# Altium PCB 2014-9-14呼叫器.PcbDoc (part 1 of 2)
Units mm, origin at the board's own origin, x right, y up, seen from the top; angles counter-clockwise.
Board outline 60 x 92 mm, 2 copper layers (Top Layer, Bottom Layer); 55 components, 35 nets, 210 pads, 44 vias.
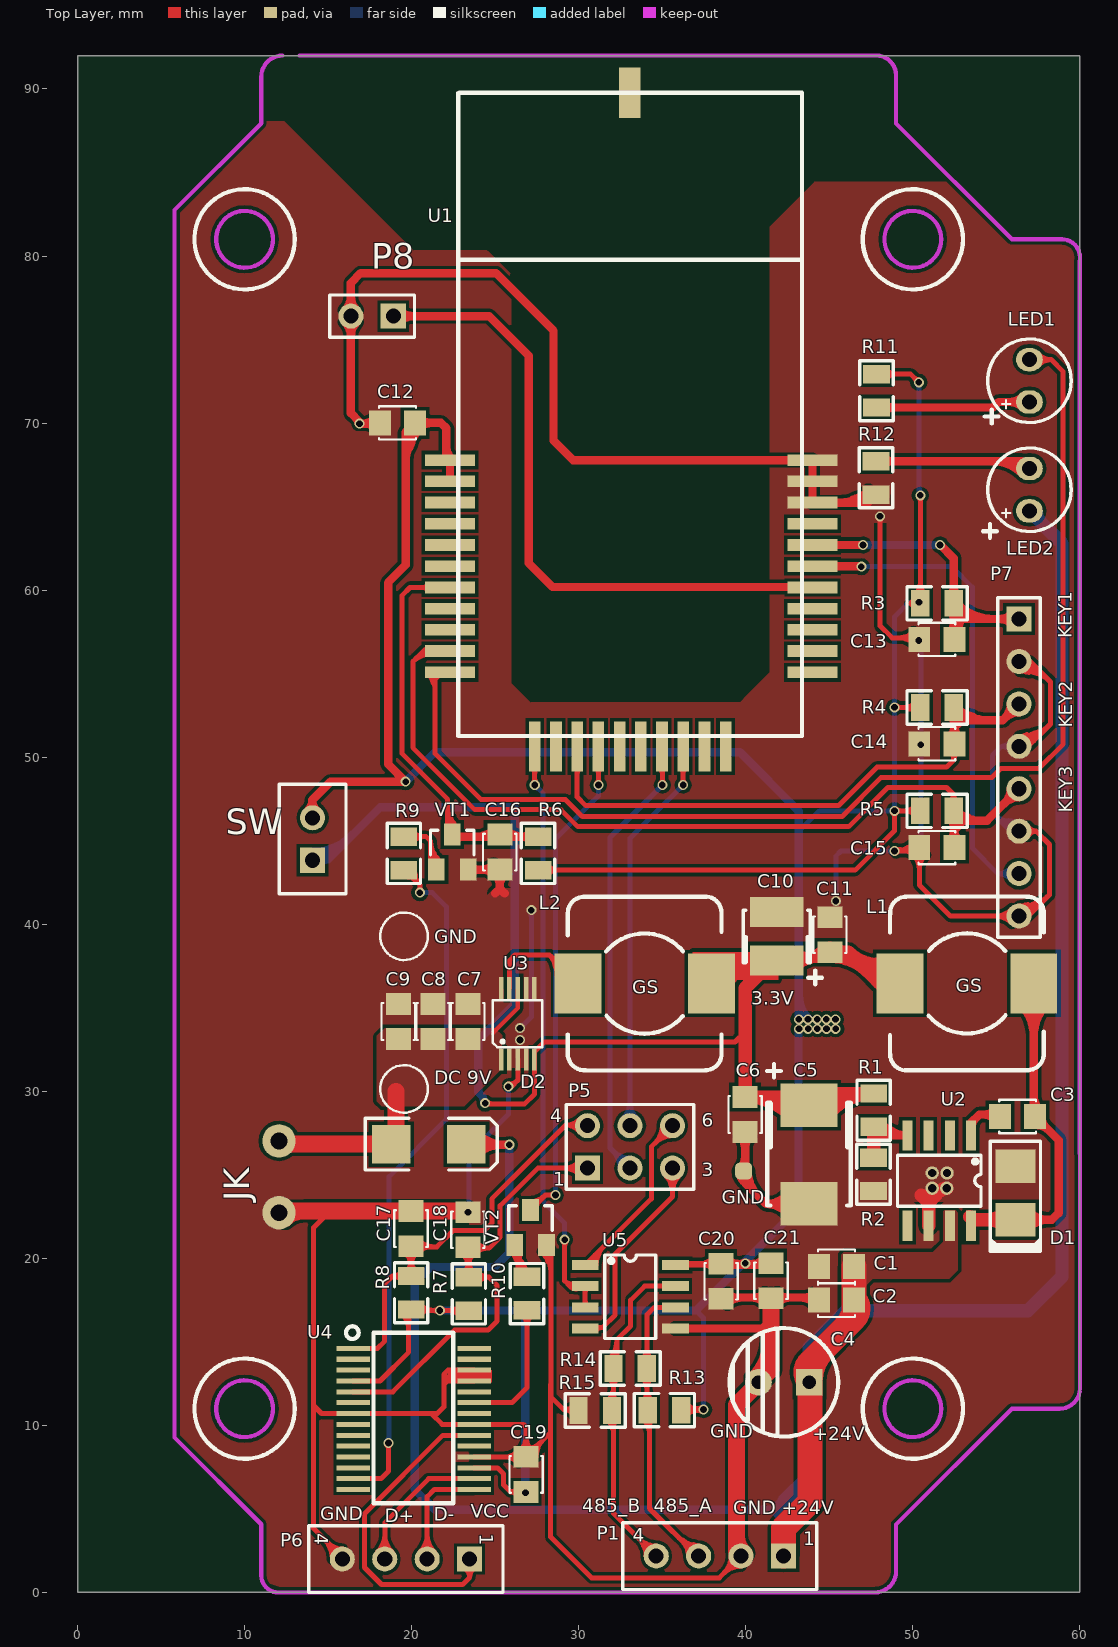
[diagram p0: Top Layer view]
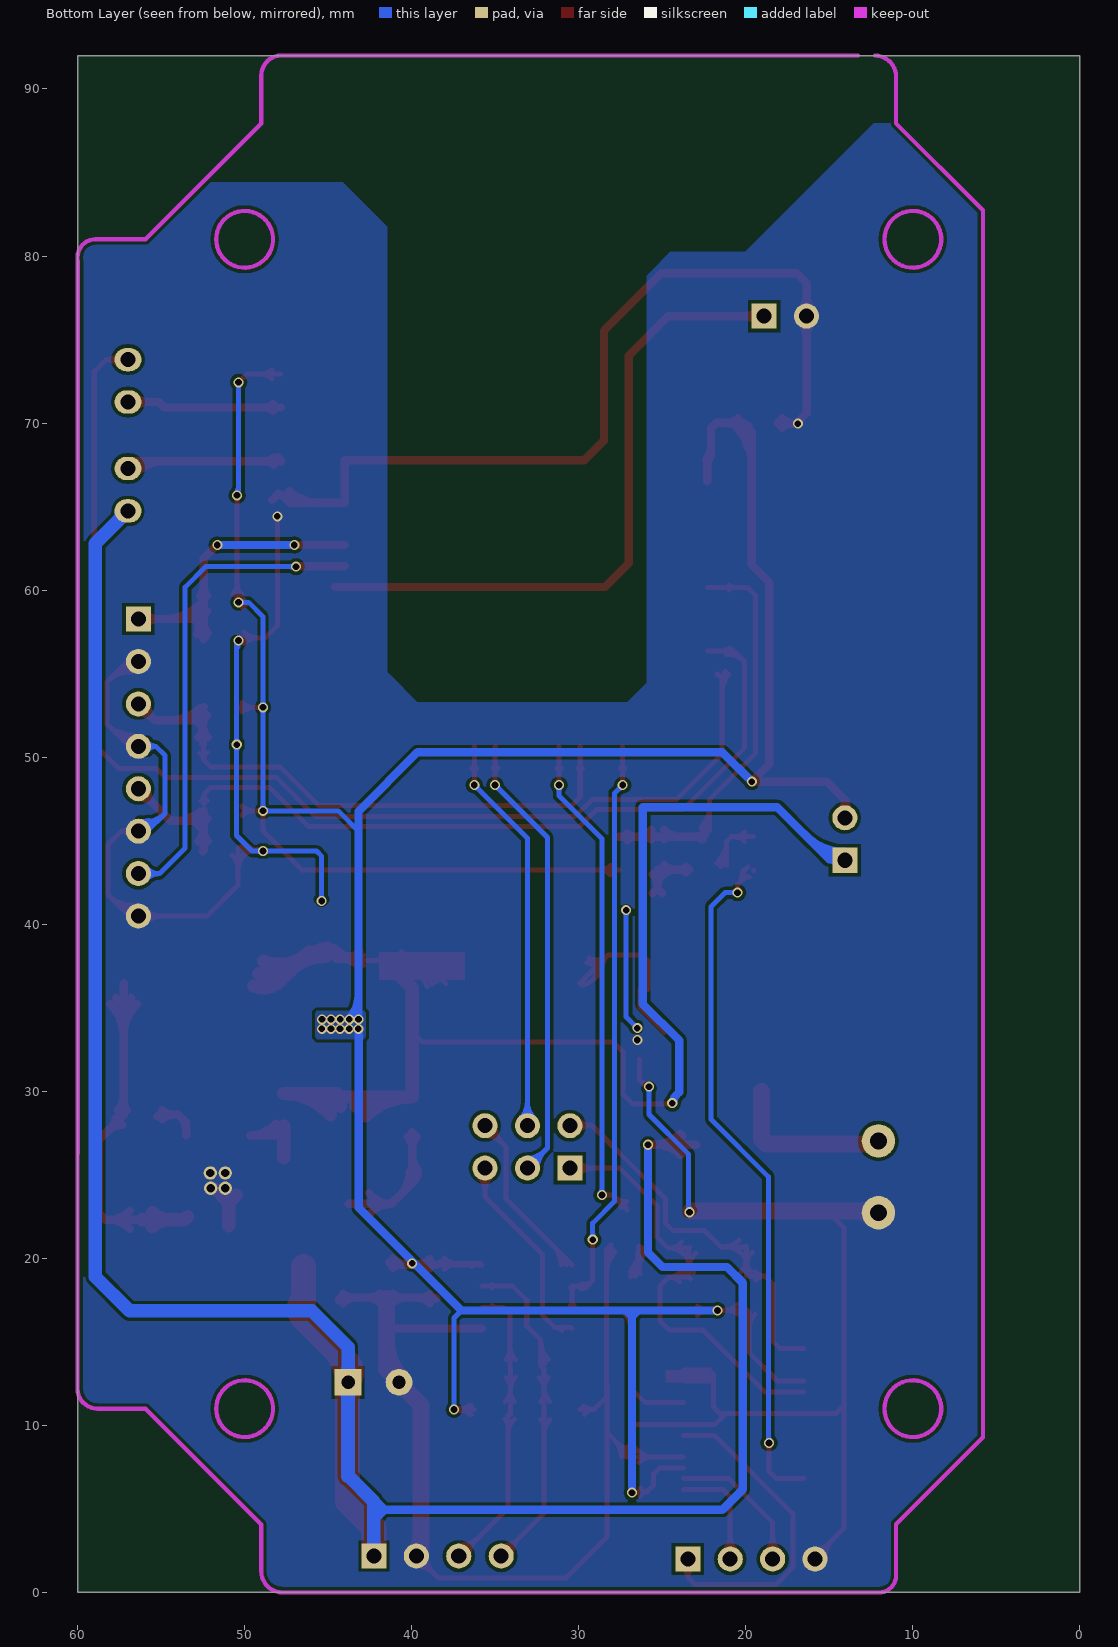
[diagram p1: Bottom Layer view, seen from below]

## Layer stack, top to bottom
Top Solder: solder mask 0.0102, Solder Resist, Dk 3.5
Top Layer: signal copper 0.0356
Dielectric1: dielectric 0.32, FR-4, Dk 4.8
Bottom Layer: signal copper 0.0356
Bottom Solder: solder mask 0.0102, Solder Resist, Dk 3.5

## Board outline
0,0 60,0 60,92 0,92

## Design rules (kind name [scope] priority, off if disabled: settings)
Clearance [All] p1: gap=0.2
FabricationTestPointUsage TestPointUsage [All] p1: valid=0 allowmultiple=FALSE
FabricationTestpoint Testpoint [All] p1: side=3 testpointundercomponent=TRUE minsize=1.016 maxsize=2.54 preferedsize=1.524 minholesize=0 maxholesize=1.016 preferedholesize=0.813 testpointgrid=0.025 allowsidetop=TRUE allowsidebottom=TRUE usegrid=TRUE gridtolerance=0
PolygonConnect [All] p1: connectstyle=Direct reliefconductorwidth=0.5 reliefentries=4 polygonreliefangle="90 Angle" airgapwidth=0.254
RoutingVias [All] p1: holewidth=0.711 width=1.27 viastyle="Through Hole" minholewidth=0.711 minwidth=1.27 maxholewidth=0.711 maxwidth=1.27
SolderMaskExpansion [All] p1: expansion=0.102
Width [All] p1: maxlimit=2 minlimit=0.254 preferedwidth=0.3 minimp=50.000000 maximp=50.000000 favimp=50.000000
27 further rules are at their usual default settings.

## Components (designator, comment, footprint, x,y, rotation, side; value= is the part's Value field where it differs from the comment)
C1 "4.7μF/10%/0805" C-0805 43.73,18.62 r0 top
C2 "4.7μF/10%/0805" C-0805 43.73,16.6 r0 top
C3 "0.01μF/10%/0805" C-0805 54.57,27.59 r0 top
C4 "220μF" CZ3.0/6.5 42.28,12.58 r0 top
C5 "476C" C-TAN-D 41.28,30.46 r270 top
C6 "0.1μf/10%/0805" C-0805 40.86,26.91 r90 top
C7 "4.7μF/10%/0805" C-0805 22.462,35.876 r270 top
C8 "4.7μF/10%/0805" C-0805 20.382,35.876 r270 top
C9 "4.7μF/10%/0805" C-0805 18.302,35.876 r270 top
C10 "47uF/20%/10V/B" C-TAN-B 43.85,36.94 r90 top
C11 "0.1μf/10%/0805" C-0805 44.14,41.07 r270 top
C12 "0.1uf/10%/0805" C-0805 17.45,69.11 r0 top
C13 "0.1uf/10%/0805" C-0805 49.74,56.15 r0 top
C14 "0.1uf/10%/0805" C-0805 49.74,49.9 r0 top
C15 "0.1uf/10%/0805" C-0805 49.74,43.69 r0 top
C16 "0.1uf/10%/0805" C-0805 26.18,42.62 r90 top
C17 "100pf/10%/0805" C-0805 19.06,23.48 r270 top
C18 "100pf/10%/0805" C-0805 22.47,23.41 r270 top
C19 "0.1μf/10%/0805" C-0805 25.95,8.77 r270 top
C20 "0.1uf/10%/0805" C-0805 39.42,16.93 r90 top
C21 "1uf/10%/0805" C-0805 42.41,16.96 r90 top
D1 "1N5408/SMA" "SMA 2+" 54.59,27.05 r270 top
D2 "1N5408/SMB" smb 21.03,26.84 r0 top
L1 "15μH" GSDS104C2 53.24,36.46 r270 top
L2 "15μH" GSDS104C2 33.95,36.45 r90 top
LED1 "green LED" LED-φ3 56.98,72.53 r90 top
LED2 "VDD33" LED-φ3 56.98,66.01 r90 top
P1 "1*4/2.54排针" PIN-S-2.54-1*4 42.26,2.18 r180 top locked
P5 "2*3排针" HDR2X3_CEN 30.53,25.4 r0 top
P6 "1*4/2.54排针" PIN-S-2.54-1*4 23.47,2 r180 top
P7 "Header 8" HDR1X8 56.36,58.27 r270 top (schematic designator P6)
P8 "Header 2" HDR1X2 18.9,76.4 r180 top
R1 "10K" R-0805 48.56,27.37 r90 top
R2 "7580M\3.24K" R-0805 46.75,26.53 r270 top
R3 "10K/5%/0805" R-0805 52.95,60.11 r180 top
R4 "10K/5%/0805" R-0805 52.95,53.88 r180 top
R5 "10K/5%/0805" R-0805 52.95,47.69 r180 top
R6 "10K/5%/0805" R-0805 26.67,45.74 r270 top
R7 "3.3K/5%/0805" R-0805 22.52,19.37 r270 top
R8 "3.3K/5%/0805" R-0805 19.07,19.44 r270 top
R9 "1K/5%/0805" R-0805 18.63,45.74 r270 top
R10 "1K/5%/0805" R-0805 26.01,19.39 r270 top
R11 "3.3K/5%/0805" R-0805 46.92,73.43 r270 top
R12 "1.5K/5%/0805" R-0805 48.69,65.22 r90 top
R13 "3.3K/5%/0805" R-0805 33.63,10.01 r0 top
R14 "120ohm" R-0805 31.58,12.5 r0 top
R15 "3.3K/5%/0805" R-0805 29.49,9.99 r0 top
SW "SW-1" PIN-S-2.54-1*2 14.07,43.83 r90 top
U1 "STM32W_1" STM32W108-3 43.37,51.27 r90 top locked
U2 "TPS5430" SO-G8#1 51.57,24.65 r180 top
U3 "TPS62056" MSOP-10 25.352,32.006 r0 top
U4 "FT232R" SSOP-28 16.5,14.61 r0 top
U5 "MAX3485CSA" SO-G8#2 33.09,17.69 r270 top
VT1 "2N3904" SOT23-3 21.48,43.27 r0 top
VT2 "2N3904" SOT23-3 26.17,20.8 r0 top locked

## Footprints (in the part's own frame and the unit in brackets; to place one, negate y for a bottom-side part, rotate by r counter-clockwise, add the part's x,y. Pads: shape width x height; smd on the part's side, far side on the other; paste and mask are expansions set on the pad)
C-0805 [mm]
  rect 1.3x1.5 smd: 1(0.65,0.9) 2(2.75,0.9)
  silkscreen extent 0.6,-0.1 2.8,1.9
C-TAN-B [mm]
  rect 1.8x3.2 smd: 1(0.9,2) 2(3.8,2)
  silkscreen extent 0.75,0 3.9,4
C-TAN-D [mm]
  rect 2.6x3.4 smd: 1(1.3,2.5) 2(7.2,2.5)
  silkscreen extent 1.15,0 7.3,5
CZ3.0/6.5 [mm]
  rect 1.6x1.6 hole 0.8: 1(1.524,0)
  round 1.6 hole 0.8: 2(-1.524,0)
  silkscreen extent -3.25,-3.25 3.25,3.25
GSDS104C2 [mm]
  rect 3.6x2.8 smd: 1(0,4) 2(0,-4)
  silkscreen extent -5.2,-4.6 5.21,4.6
HDR1X2 [mm] "Connector; Header; 2 Position"
  rect 1.5x1.5 hole 0.9: 1(0,0)
  round 1.5 hole 0.9: 2(2.54,0)
  silkscreen extent -1.27,-1.27 3.81,1.27
HDR1X8 [mm] "Connector; Header; 8 Position"
  rect 1.5x1.5 hole 0.9: 1(0,0)
  round 1.5 hole 0.9: 2(2.54,0) 3(5.08,0) 4(7.62,0) 5(10.16,0) 6(12.7,0) 7(15.24,0) 8(17.78,0)
  silkscreen extent -1.27,-1.27 19.05,1.27
HDR2X3_CEN [mm] "Connector; Header; 3x2 Position"
  rect 1.5x1.5 hole 0.9: 1(0,0)
  round 1.5 hole 0.9: 2(2.54,0) 3(5.08,0) 4(0,2.54) 5(2.54,2.54) 6(5.08,2.54)
  silkscreen extent -1.27,-1.27 6.35,3.81
LED-φ3 [mm]
  oval 1.4x1.6 hole 0.9: 1(-1.27,0) 2(1.27,0)
  silkscreen extent -2.5,-2.5 2.5,2.5
MSOP-10 [mm]
  rect 0.27x1.3 smd mask+0.05: 1(0,-0.1) 2(0.5,-0.1) 3(1,-0.1) 4(1.5,-0.1) 5(2,-0.1) 6(2,4.175) 7(1.5,4.175) 8(1,4.175) 9(0.5,4.175) 10(0,4.175)
  silkscreen extent -0.51,0.64 2.46,3.43
PIN-S-2.54-1*2 [mm]
  rect 1.5x1.5 hole 0.9: 1(0,0)
  round 1.5 hole 0.9: 2(2.54,0)
  silkscreen extent -2,-2 4.54,2
PIN-S-2.54-1*4 [mm]
  rect 1.5x1.5 hole 0.9: 1(0,0)
  round 1.5 hole 0.9: 2(2.54,0) 3(5.08,0) 4(7.62,0)
  silkscreen extent -2,-2 9.62,2
R-0805 [mm]
  rect 1.1x1.6 smd: 1(0.5,0.9) 2(2.5,0.9)
  silkscreen extent -0.3,-0.1 3.3,1.9
"SMA 2+" [mm]
  rect 2x2.4 smd: 1(1.538,1.554) 2(4.738,1.554)
  silkscreen extent 0.04,0.05 6.64,3.05
smb [mm] "DO-214-AA/SMB; 2 C-Bend Leads; Body 5.3 x 3.6 mm, inc. leads (LxW)"
  rect 2.3x2.3 smd: 1(-2.25,0) 2(2.25,0)
  silkscreen extent -3.8,-1.55 4.1,1.55
SO-G8#1 [mm]
  rect 0.6x1.8 smd: 1(-1.916,-2.7) 2(-0.646,-2.7) 3(0.624,-2.7) 4(1.894,-2.7) 5(1.894,2.7) 6(0.624,2.7) 7(-0.646,2.7) 8(-1.916,2.7)
  silkscreen extent -2.51,-1.52 2.49,1.52
SO-G8#2 [mm]
  rect 0.6x1.6 smd: 1(-1.916,-2.7) 2(-0.646,-2.7) 3(0.624,-2.7) 4(1.894,-2.7) 5(1.894,2.7) 6(0.624,2.7) 7(-0.646,2.7) 8(-1.916,2.7)
  silkscreen extent -2.51,-1.52 2.49,1.52
SOT23-3 [mm]
  rect 1x1.3 smd: 1(0,0) 2(1.9,0) 3(0.95,2.1)
  silkscreen extent -0.35,0.87 2.25,2.35
SSOP-28 [mm]
  rect 2x0.3 smd: 1(0,0) 2(0,-0.65) 3(0,-1.3) 4(0,-1.95) 5(0,-2.6) 6(0,-3.25) 7(0,-3.9) 8(0,-4.55) 9(0,-5.2) 10(0,-5.85) 11(0,-6.5) 12(0,-7.15) 13(0,-7.8) 14(0,-8.45) 15(7.239,-8.45) 16(7.239,-7.8) 17(7.239,-7.15) 18(7.239,-6.5) 19(7.239,-5.85) 20(7.239,-5.2) 21(7.239,-4.55) 22(7.239,-3.9) 23(7.239,-3.25) 24(7.239,-2.6) 25(7.239,-1.95) 26(7.239,-1.3) 27(7.239,-0.65) 28(7.239,0)
  silkscreen extent -0.43,-9.27 5.99,1.32
STM32W108-3 [mm]
  rect 0.7x3 smd: 1(16.51,21.074) 2(15.24,21.074) 3(13.97,21.074) 4(12.7,21.074) 5(11.43,21.074) 6(10.16,21.074) 7(8.89,21.074) 8(7.62,21.074) 9(6.35,21.074) 10(5.08,21.074) 11(3.81,21.074) 22(3.81,-0.627) 23(5.08,-0.627) 24(6.35,-0.627) 25(7.62,-0.627) 26(8.89,-0.627) 27(10.16,-0.627) 28(11.43,-0.627) 29(12.7,-0.627) 30(13.97,-0.627) 31(15.24,-0.627) 32(16.51,-0.627)
  rect 3x0.7 smd: 12(-0.627,16.002) 13(-0.627,14.732) 14(-0.627,13.462) 15(-0.627,12.192) 16(-0.627,10.922) 17(-0.627,9.652) 18(-0.627,8.382) 19(-0.627,7.112) 20(-0.627,5.842) 21(-0.627,4.572)
  rect 3x1.3 smd: ""(38.5,10.314)
  silkscreen extent 0,0 38.5,20.57

## Part data
C1 C2 C3 C6 C7 C8 C9 C11 C12 C13 C14 C15 C16 C17 C18 C19 C20 C21: library part Cap, "Capacitor"
C4 C5: library part "Cap Pol1", "Polarized Capacitor (Radial)"
C10: library part ASC-0013BA
D1 D2: library part "Diode 1N5408", "3 Amp Medium Power Silicon Rectifier Diode"
L1 L2: library part Inductor, "Inductor"
LED1: library part LED
LED2: library part LED3, "Typical BLUE SiC LED"
P1 P6: library part "Header 4", "Header, 4-Pin"
P5: library part "Header 3X2A", "Header, 3-Pin, Dual row"
P7: "Header, 8-Pin"
P8: "Header, 2-Pin"
R1 R2 R3 R4 R5 R6 R12: library part Res2, "Resistor"
R7 R8: library part RES_1
R9 R10 R11 R13 R14 R15: library part RES, "R"
U1: library part STM32W108-3
U5: library part MAX485CSA, "Low-Power, Slew-Rate-Limited RS-485/RS-422 Transceiver"
VT1 VT2: library part NPN, "NPN Transistor"

## Free pads (board coordinates)
  round 2 hole 1: 0(12.06,22.73) 1(12.06,27.03)
  round 0.8 hole 0.5: 0(51.16,25.11) 1(52.05,25.11) 2(51.16,24.2) 3(52.03,24.2)
  rrect50% 1x1 smd: 5(39.87,25.23)

## Via types
v1: diameter 0.6, hole 0.4, Top Layer to Bottom Layer, 44 vias

## Nets (pads, with @x,y where several pads share a name; then routed paths per layer and width w, separated by ;. In a path a pad name is that pad's centre, name@x,y a point inside that pad or via, vN(x,y) a via of type N, cw(c..) or ccw(c..) an arc to the next point about the centre after c; other vN are vias at no path point)
485_A: P1.3 R13.1 R14.2 U5.6 | length 52.6
  Top Layer w0.3: R13.1@34.08,10.64 R14.2@34.08,13.4 34.1,13.42 34.1,16.64 34.526,17.066 U5.6@35.79,17.066 ; R13.1@34.24,10.64 34.24,5.03 37.09,2.18 P1.3@37.18,2.18 ; 36.371,2.997 cw(c36.075,1.895) P1.3@37.18,2.18 ; 36.392,2.883 ccw(c37.321,3.131) P1.3@37.18,2.18 ; 36.867,2.864 cw(c36.647,2.043) P1.3@37.47,2.255 ; 34.08,12.184 cw(c35.046,12.184) 34.363,12.867 ccw(c35.046,12.184) 34.08,12.184 ; 34.08,12.184 ccw(c33.114,12.184) 33.797,12.867 cw(c33.114,12.184) 34.08,12.184 ; 34.928,17.066 cw(c34.928,16.704) U5.6@35.184,16.96 ; 34.928,17.066 ccw(c34.928,17.428) U5.6@35.184,17.172 ; 34.928,17.066 cw(c34.928,16.704) U5.6@35.184,16.96 ; 34.928,17.066 ccw(c34.928,17.428) U5.6@35.184,17.172 ; 34.928,17.066 cw(c34.928,16.704) U5.6@35.184,16.96 ; 34.928,17.066 ccw(c34.928,17.428) U5.6@35.184,17.172 ; 34.928,17.066 cw(c34.928,16.704) U5.6@35.184,16.96 ; 34.928,17.066 ccw(c34.928,17.428) U5.6@35.184,17.172 ; 36.22,3.14 cw(c35.346,2.266) 36.581,2.208 ccw(c35.346,2.266) 36.22,3.14 ; 36.22,3.14 ccw(c37.094,4.014) 37.152,2.779 cw(c37.094,4.014) 36.22,3.14 ; 36.51,2.533 ccw(c37.356,2.718) P1.3@37.087,1.895 ; 36.51,2.533 ccw(c37.356,2.718) P1.3@37.087,1.895 ; 36.51,2.533 ccw(c37.356,2.718) P1.3@37.087,1.895 ; 36.51,2.533 ccw(c37.356,2.718) P1.3@37.087,1.895 ; 36.827,2.85 cw(c36.642,2.004) P1.3@37.465,2.273 ; 36.827,2.85 cw(c36.642,2.004) P1.3@37.465,2.273 ; 36.827,2.85 cw(c36.642,2.004) P1.3@37.465,2.273 ; 36.827,2.85 cw(c36.642,2.004) P1.3@37.465,2.273 ; R14.2@33.797,13.933 ccw(c33.066,14.664) 34.1,14.664 cw(c33.066,14.664) R14.2@33.797,13.933 ; R13.1@33.847,10.377 cw(c32.899,9.429) 34.24,9.429 ccw(c32.899,9.429) R13.1@33.847,10.377 ; R13.1@33.847,11.443 ccw(c33.285,12.005) 34.08,12.005 cw(c33.285,12.005) R13.1@33.847,11.443 ; 34.08,12.246 ccw(c35.216,12.246) 34.413,11.443 cw(c35.216,12.246) 34.08,12.246 ; 34.1,14.567 ccw(c34.997,14.567) 34.363,13.933 cw(c34.997,14.567) 34.1,14.567 ; 34.24,9.96 cw(c34.83,9.96) 34.413,10.377 ccw(c34.83,9.96) 34.24,9.96 ; 36.002,3.268 ccw(c37.18,4.446) 37.18,2.78 cw(c37.18,4.446) 36.002,3.268 ; 36.219,3.051 cw(c35.349,2.18) 36.58,2.18 ccw(c35.349,2.18) 36.219,3.051 ; 36.514,2.756 ccw(c37.18,3.422) 37.18,2.48 cw(c37.18,3.422) 36.514,2.756
485_B: P1.4 R14.1 R15.2 U5.7 | length 55.3
  Top Layer w0.3: 33.837,2.936 ccw(c34.85,3.207) P1.4@34.64,2.18 ; 33.884,2.983 cw(c33.613,1.97) P1.4@34.64,2.18 ; U5.7@35.79,18.336 33.946,18.336 33.11,17.5 33.11,15.95 32.28,15.12 32.28,13.6 R14.1@32.08,13.4 32.08,4.74 P1.4@34.64,2.18 ; R15.2@31.707,10.357 cw(c30.807,9.457) 32.08,9.457 ; R15.2@31.707,10.357 cw(c30.807,9.457) 32.08,9.457 ; R15.2@31.707,10.357 cw(c30.807,9.457) 32.08,9.457 ; R15.2@31.707,10.357 cw(c30.807,9.457) 32.08,9.457 ; R15.2@31.707,11.423 ccw(c30.807,12.323) 32.08,12.323 ; R15.2@31.707,11.423 ccw(c30.807,12.323) 32.08,12.323 ; R15.2@31.707,11.423 ccw(c30.807,12.323) 32.08,12.323 ; R15.2@31.707,11.423 ccw(c30.807,12.323) 32.08,12.323 ; R14.1@31.797,12.867 cw(c31.114,12.184) 32.08,12.184 ; R14.1@31.797,12.867 cw(c31.114,12.184) 32.08,12.184 ; R14.1@31.797,12.867 cw(c31.114,12.184) 32.08,12.184 ; R14.1@31.797,12.867 cw(c31.114,12.184) 32.08,12.184 ; R14.1@31.797,13.933 ccw(c30.631,15.099) 32.28,15.099 ; R14.1@31.797,13.933 ccw(c30.631,15.099) 32.28,15.099 ; R14.1@31.797,13.933 ccw(c30.631,15.099) 32.28,15.099 ; R14.1@31.797,13.933 ccw(c30.631,15.099) 32.28,15.099 ; R14.1@32.009,13.721 ccw(c31.356,14.374) 32.28,14.374 ; R14.1@32.009,13.721 ccw(c31.356,14.374) 32.28,14.374 ; R14.1@32.009,13.721 ccw(c31.356,14.374) 32.28,14.374 ; R14.1@32.009,13.721 ccw(c31.356,14.374) 32.28,14.374 ; 32.08,9.892 cw(c32.738,9.892) R15.2@32.273,10.357 ; 32.08,9.892 cw(c32.738,9.892) R15.2@32.273,10.357 ; 32.08,9.892 cw(c32.738,9.892) R15.2@32.273,10.357 ; 32.08,9.892 cw(c32.738,9.892) R15.2@32.273,10.357 ; 32.08,11.888 ccw(c32.738,11.888) R15.2@32.273,11.423 ; 32.08,11.888 ccw(c32.738,11.888) R15.2@32.273,11.423 ; 32.08,11.888 ccw(c32.738,11.888) R15.2@32.273,11.423 ; 32.08,11.888 ccw(c32.738,11.888) R15.2@32.273,11.423 ; 32.08,12.184 cw(c33.046,12.184) R14.1@32.363,12.867 ; 32.08,12.184 cw(c33.046,12.184) R14.1@32.363,12.867 ; 32.08,12.184 cw(c33.046,12.184) R14.1@32.363,12.867 ; 32.08,12.184 cw(c33.046,12.184) R14.1@32.363,12.867 ; 33.616,3.204 cw(c32.591,2.18) 34.04,2.18 ccw(c32.591,2.18) 33.616,3.204 ; 33.616,3.204 ccw(c34.64,4.229) 34.64,2.78 cw(c34.64,4.229) 33.616,3.204 ; 34.928,18.336 cw(c34.928,17.974) U5.7@35.184,18.23 ; 34.928,18.336 ccw(c34.928,18.698) U5.7@35.184,18.442 ; 34.928,18.336 cw(c34.928,17.974) U5.7@35.184,18.23 ; 34.928,18.336 ccw(c34.928,18.698) U5.7@35.184,18.442 ; 34.928,18.336 cw(c34.928,17.974) U5.7@35.184,18.23 ; 34.928,18.336 ccw(c34.928,18.698) U5.7@35.184,18.442 ; 34.928,18.336 cw(c34.928,17.974) U5.7@35.184,18.23 ; 34.928,18.336 ccw(c34.928,18.698) U5.7@35.184,18.442
/RESET: C16.2 R6.1 U1.7 VT1.3 | length 57.2
  Top Layer w0.3: VT1.3@22.208,45.791 ccw(c21.91,46.155) 22.318,46.39 ; U1.7@22.296,60.16 19.9,60.16 19.43,59.69 19.43,50.21 22.16,47.48 22.16,45.64 VT1.3@22.43,45.37 ; VT1.3@22.398,45.559 ccw(c22.137,45.878) 22.494,46.085 ; 20.663,60.16 cw(c20.663,59.677) U1.7@21.005,60.019 ; 20.663,60.16 ccw(c20.663,60.643) U1.7@21.005,60.301 ; 20.663,60.16 cw(c20.663,59.677) U1.7@21.005,60.019 ; 20.663,60.16 ccw(c20.663,60.643) U1.7@21.005,60.301 ; 20.663,60.16 cw(c20.663,59.677) U1.7@21.005,60.019 ; 20.663,60.16 ccw(c20.663,60.643) U1.7@21.005,60.301 ; 20.663,60.16 cw(c20.663,59.677) U1.7@21.005,60.019 ; 20.663,60.16 ccw(c20.663,60.643) U1.7@21.005,60.301 ; 22.16,46.292 ccw(c23.203,46.292) VT1.3@22.465,45.555 ; 22.16,46.292 ccw(c23.203,46.292) VT1.3@22.465,45.555 ; 22.16,46.292 ccw(c23.203,46.292) VT1.3@22.465,45.555 ; 22.16,46.292 ccw(c23.203,46.292) VT1.3@22.465,45.555 ; VT1.3@22.18,45.765 ccw(c22.041,45.901) VT1.3@22.209,45.998 ; VT1.3@22.18,45.765 ccw(c22.041,45.901) VT1.3@22.209,45.998 ; VT1.3@22.18,45.765 ccw(c22.041,45.901) VT1.3@22.209,45.998 ; VT1.3@22.18,45.765 ccw(c22.041,45.901) VT1.3@22.209,45.998 ; VT1.3@22.18,45.765 ccw(c22.041,45.901) VT1.3@22.209,45.998 ; VT1.3@22.209,45.998 ccw(c22.432,46.127) VT1.3@22.431,45.87 ; VT1.3@22.209,45.998 ccw(c22.432,46.127) VT1.3@22.431,45.87 ; VT1.3@22.209,45.998 ccw(c22.432,46.127) VT1.3@22.431,45.87 ; VT1.3@22.209,45.998 ccw(c22.432,46.127) VT1.3@22.431,45.87 ; VT1.3@22.209,45.998 ccw(c22.432,46.127) VT1.3@22.431,45.87 ; 22.16,47.017 ccw(c23.927,47.017) 22.677,45.767 cw(c23.927,47.017) 22.16,47.017
  Top Layer w0.5: VT1.3@22.43,45.37 22.56,45.24 R6.1@27.57,45.24 ; VT1.3@22.607,45.043 cw(c23.082,44.568) 23.082,45.24 ; VT1.3@22.607,45.043 cw(c23.082,44.568) 23.082,45.24 ; VT1.3@22.607,45.043 cw(c23.082,44.568) 23.082,45.24 ; VT1.3@22.607,45.043 cw(c23.082,44.568) 23.082,45.24 ; VT1.3@22.607,45.397 ccw(c22.985,45.775) 22.985,45.24 ; VT1.3@22.607,45.397 ccw(c22.985,45.775) 22.985,45.24 ; VT1.3@22.607,45.397 ccw(c22.985,45.775) 22.985,45.24 ; VT1.3@22.607,45.397 ccw(c22.985,45.775) 22.985,45.24 ; 23.901,45.24 ccw(c23.901,46.649) C16.2@24.897,45.653 ; 23.901,45.24 ccw(c23.901,46.649) C16.2@24.897,45.653 ; 23.901,45.24 ccw(c23.901,46.649) C16.2@24.897,45.653 ; 23.901,45.24 ccw(c23.901,46.649) C16.2@24.897,45.653 ; 24.528,45.24 cw(c24.528,44.718) C16.2@24.897,45.087 ; 24.528,45.24 cw(c24.528,44.718) C16.2@24.897,45.087 ; 24.528,45.24 cw(c24.528,44.718) C16.2@24.897,45.087 ; 24.528,45.24 cw(c24.528,44.718) C16.2@24.897,45.087 ; C16.2@25.663,45.087 cw(c26.032,44.718) 26.032,45.24 ; C16.2@25.663,45.087 cw(c26.032,44.718) 26.032,45.24 ; C16.2@25.663,45.087 cw(c26.032,44.718) 26.032,45.24 ; C16.2@25.663,45.087 cw(c26.032,44.718) 26.032,45.24 ; C16.2@25.663,45.653 ccw(c26.659,46.649) 26.659,45.24 ; C16.2@25.663,45.653 ccw(c26.659,46.649) 26.659,45.24 ; C16.2@25.663,45.653 ccw(c26.659,46.649) 26.659,45.24 ; C16.2@25.663,45.653 ccw(c26.659,46.649) 26.659,45.24 ; 26.596,45.24 cw(c26.596,44.516) R6.1@27.108,45.028 ; 26.596,45.24 ccw(c26.596,45.964) R6.1@27.108,45.452 ; 26.596,45.24 cw(c26.596,44.516) R6.1@27.108,45.028 ; 26.596,45.24 ccw(c26.596,45.964) R6.1@27.108,45.452 ; 26.596,45.24 cw(c26.596,44.516) R6.1@27.108,45.028 ; 26.596,45.24 ccw(c26.596,45.964) R6.1@27.108,45.452 ; 26.596,45.24 cw(c26.596,44.516) R6.1@27.108,45.028 ; 26.596,45.24 ccw(c26.596,45.964) R6.1@27.108,45.452
BOOT: U1.15 VT2.3 | length 44.2
  Top Layer w0.3: VT2.3@27.12,22.9 28.01,23.79 v1(28.61,23.79) ; VT2.3@27.167,23.034 cw(c27.958,22.757) 27.741,23.566 ; U1.15@31.178,50.643 31.18,50.641 v1(31.18,48.33) ; 28.248,23.79 cw(c28.248,23.428) 28.504,23.684 ccw(c28.248,23.428) 28.248,23.79 ; 28.248,23.79 ccw(c28.248,24.152) 28.504,23.896 cw(c28.248,24.152) 28.248,23.79 ; U1.15@31.037,49.352 cw(c30.69,49.005) 31.18,49.005 ; U1.15@31.037,49.352 cw(c30.69,49.005) 31.18,49.005 ; U1.15@31.037,49.352 cw(c30.69,49.005) 31.18,49.005 ; U1.15@31.037,49.352 cw(c30.69,49.005) 31.18,49.005 ; v1@31.074,48.436 ccw(c30.818,48.692) 31.18,48.692 ; v1@31.074,48.436 ccw(c30.818,48.692) 31.18,48.692 ; v1@31.074,48.436 ccw(c30.818,48.692) 31.18,48.692 ; v1@31.074,48.436 ccw(c30.818,48.692) 31.18,48.692 ; v1@31.074,48.436 ccw(c30.818,48.692) 31.18,48.692 ; 31.18,48.692 ccw(c31.542,48.692) v1@31.286,48.436 ; 31.18,48.692 ccw(c31.542,48.692) v1@31.286,48.436 ; 31.18,48.692 ccw(c31.542,48.692) v1@31.286,48.436 ; 31.18,48.692 ccw(c31.542,48.692) v1@31.286,48.436 ; 31.18,48.692 ccw(c31.542,48.692) v1@31.286,48.436 ; 31.18,49.015 cw(c31.656,49.015) U1.15@31.319,49.352 ; 31.18,49.015 cw(c31.656,49.015) U1.15@31.319,49.352 ; 31.18,49.015 cw(c31.656,49.015) U1.15@31.319,49.352 ; 31.18,49.015 cw(c31.656,49.015) U1.15@31.319,49.352 ; VT2.3@27.12,23.4 ccw(c27.12,24.607) 27.974,23.754 cw(c27.12,24.607) VT2.3@27.12,23.4 ; VT2.3@27.47,23.05 cw(c27.953,23.05) 27.611,23.391 ccw(c27.953,23.05) VT2.3@27.47,23.05
  Bottom Layer w0.3: v1(28.61,23.79) 28.62,23.8 28.62,45.13 31.18,47.69 v1(31.18,48.33) ; v1@31.074,48.224 cw(c30.818,47.968) 31.18,47.968 ; v1@31.074,48.224 cw(c30.818,47.968) 31.18,47.968 ; v1@31.074,48.224 cw(c30.818,47.968) 31.18,47.968 ; v1@31.074,48.224 cw(c30.818,47.968) 31.18,47.968 ; v1@31.074,48.224 cw(c30.818,47.968) 31.18,47.968 ; 31.18,47.968 cw(c31.542,47.968) v1@31.286,48.224 ; 31.18,47.968 cw(c31.542,47.968) v1@31.286,48.224 ; 31.18,47.968 cw(c31.542,47.968) v1@31.286,48.224 ; 31.18,47.968 cw(c31.542,47.968) v1@31.286,48.224 ; 31.18,47.968 cw(c31.542,47.968) v1@31.286,48.224 ; v1@28.504,23.896 ccw(c28.224,24.176) 28.62,24.176 cw(c28.224,24.176) v1@28.504,23.896 ; 28.62,24.128 ccw(c28.948,24.128) 28.716,23.896 cw(c28.948,24.128) 28.62,24.128
CBUS0: R10.2 U4.23 | length 14.2
  Top Layer w0.3: U4.23@23.739,11.36 26.01,11.36 26.91,12.26 R10.2@26.91,16.89 ; R10.2@26.627,16.607 cw(c25.944,15.924) 26.91,15.924 ; R10.2@26.627,16.607 cw(c25.944,15.924) 26.91,15.924 ; R10.2@26.627,16.607 cw(c25.944,15.924) 26.91,15.924 ; R10.2@26.627,16.607 cw(c25.944,15.924) 26.91,15.924 ; 26.91,15.924 cw(c27.876,15.924) R10.2@27.193,16.607 ; 26.91,15.924 cw(c27.876,15.924) R10.2@27.193,16.607 ; 26.91,15.924 cw(c27.876,15.924) R10.2@27.193,16.607 ; 26.91,15.924 cw(c27.876,15.924) R10.2@27.193,16.607
CBUS2: R9.2 U4.13 | length 48.3
  Top Layer w0.3: U4.13@16.5,6.81 18.16,6.81 18.61,7.26 v1(18.61,8.95) ; R9.2@19.51,43.22 R9.2@19.53,43.24 ; R9.2@19.879,43.414 cw(c19.523,42.788) R9.2@20.232,42.917 ; R9.2@19.96,42.89 20.49,42.36 ; v1(20.49,41.89) 20.49,42.36 ; 18.61,8.588 cw(c18.972,8.588) 18.716,8.844 ccw(c18.972,8.588) 18.61,8.588 ; 18.61,8.588 ccw(c18.248,8.588) 18.504,8.844 cw(c18.248,8.588) 18.61,8.588 ; 20.49,42.252 cw(c20.128,42.252) 20.384,41.996 ccw(c20.128,42.252) 20.49,42.252 ; 20.49,42.252 ccw(c20.852,42.252) 20.596,41.996 cw(c20.852,42.252) 20.49,42.252 ; 20.49,42.36 cw(c21.25,43.12) 20.179,43.207 ccw(c21.25,43.12) 20.49,42.36 ; R9.2@19.78,42.84 cw(c19.78,42.285) 20.173,42.677 ccw(c19.78,42.285) R9.2@19.78,42.84
  Bottom Layer w0.3: v1@18.49,8.95 18.65,9.11 18.65,24.89 22.08,28.32 22.08,41.05 21.24,41.89 v1(20.49,41.89) ; 20.852,41.89 cw(c20.852,42.252) 20.596,41.996 ccw(c20.852,42.252) 20.852,41.89 ; 20.852,41.89 ccw(c20.852,41.528) 20.596,41.784 cw(c20.852,41.528) 20.852,41.89 ; v1@18.504,9.056 ccw(c18.151,9.409) 18.65,9.409 cw(c18.151,9.409) v1@18.504,9.056
D+: P6.2 U4.15 | length 9
  Top Layer w0.3: P6.2@20.506,2.424 ccw(c19.481,3.449) 20.93,3.449 ccw(c22.379,3.449) P6.2@21.354,2.424 ; P6.2@20.93,2 20.93,5.73 21.36,6.16 U4.15@23.739,6.16
D-: P6.3 U4.16 | length 10.9
  Top Layer w0.3: P6.3@17.966,2.424 ccw(c16.941,3.449) 18.39,3.449 ccw(c19.839,3.449) P6.3@18.814,2.424 ; P6.3@18.39,2 18.39,4.18 21.02,6.81 U4.16@23.739,6.81
GND: C1.1 C2.1 C4.2 C5.2 C6.1 C7.1 C8.1 C9.1 C10.2 C11.1 C12.1 C13.1 C14.1 C15.1 C16.1 C17.1 C18.1 C19.1 C20.1 C21.1 D1.1 P1.2 P6.4 P7.2 P7.4 P7.6 P7.8 P8.2 pad.0 pad.1@52.05,25.11 pad.2 pad.3 pad.5 R2.2 R12.1 R15.1 U1.30 U1.31 U1.32 U2.6 U3.2 U3.3 U3.4 U3.6 U3.7 U3.10 U4.7 U4.18 U4.21 U4.25 U4.26 U5.5 VT1.2 VT2.2 | length 442.2
  Top Layer w0.3: pad.0@11.94,22.73 pad.0@12.04,22.83 ; 14.748,3.212 cw(c13.536,2) P6.4@15.25,2 ; 15.014,2.946 ccw(c15.85,3.783) P6.4@15.85,2.6 ; 15.11,22.83 14.12,21.84 14.12,11.19 ; 15.26,2.7 cw(c14.56,2) P6.4@15.55,2 ; P6.4@15.85,2 15.85,2.11 14.12,3.84 14.12,11.19 ; 21.97,12.49 22.14,12.66 ; 21.97,12.83 22.14,12.66 ; U4.18@23.739,8.11 26.84,8.11 C19.1@26.85,8.12 ; U4.25@23.739,12.66 22.14,12.66 ; U4.26@23.739,13.31 22.18,13.31 21.93,13.06 21.93,11.1 21.54,10.71 21.18,10.71 ; 25.519,8.11 ccw(c25.519,9.351) C19.1@26.396,8.474 ; 25.567,8.11 cw(c25.567,6.937) C19.1@26.396,7.766 ; v1(25.79,30.28) 25.98,30.28 26.352,30.652 ; U3.3@26.352,31.906 26.352,30.652 ; C19.1@26.496,8.474 ccw(c25.643,9.327) 26.85,9.327 ccw(c28.057,9.327) C19.1@27.204,8.474 ; C19.1@26.95,8.62 ccw(c26.95,9.586) 27.633,8.903 ; C19.1@27.15,8.12 cw(c27.874,8.12) C19.1@27.362,8.632 ; C19.1@27.45,8.12 cw(c28.899,8.12) 27.874,9.144 ; 28.001,20.094 cw(c28.348,20.295) VT2.2@28.101,20.611 ; VT2.2@28.07,20.8 28.33,20.54 28.33,11.71 29.08,10.96 ; 28.173,19.795 cw(c28.563,20.02) VT2.2@28.286,20.374 ; 28.32,12.44 28.32,9.59 ; R15.1@29.92,10.96 29.08,10.96 ; P1.2@39.12,2.18 cw(c37.671,2.18) 38.696,1.156 cw(c39.72,0.131) P1.2@39.72,1.58 ; P1.2@39.72,2.18 38.42,0.88 30.76,0.88 28.32,3.32 28.32,9.59 ; v1(48.04,64.42) 48.04,57.86 48.76,57.14 50.3,57.14 C13.1@50.39,57.05 ; v1(48.9,44.38) C15.1@49.85,44.38 ; C13.1@49.919,57.067 ccw(c50.071,57.331) C13.1@50.265,57.096 ; C15.1@50.12,44.11 C15.1@49.85,44.38 ; C15.1@50.12,44.65 C15.1@49.85,44.38 ; C15.1@50.39,44.59 50.39,42.35 52.26,40.48 56.35,40.48 P7.8@56.36,40.49 ; P7.4@56.098,50.796 cw(c57.097,50.241) 56.842,51.355 ; P7.8@56.106,40.65 cw(c57.118,40.013) 56.884,41.186 ; P7.2@56.12,55.55 ccw(c57.123,56.303) 56.947,55.061 ; P7.6@56.36,45.57 57.38,45.57 ; P7.8@56.637,40.375 cw(c57.589,39.98) 57.387,40.991 ; P7.4@56.642,50.547 cw(c57.576,50.205) 57.354,51.175 ; P7.4@56.679,51.158 ccw(c56.923,51.547) 57.025,51.1 ; P7.8@56.693,40.989 ccw(c56.948,41.371) 57.038,40.921 ; P7.2@56.72,55.25 cw(c56.996,54.883) 57.061,55.338 ; 57.498,51.505 ccw(c57.888,49.802) P7.4@56.36,50.65 ; 57.568,41.322 ccw(c57.932,39.502) P7.8@56.36,40.49 ; 57.664,54.959 cw(c57.942,56.918) P7.2@56.36,55.73 ; 14.12,11.19 14.6,10.71 U4.7@16.5,10.71 21.18,10.71 ; 21.18,10.71 21.83,10.06 U4.21@23.739,10.06 26.7,10.06 26.85,9.91 C19.1@26.85,8.12 ; 26.352,30.652 cw(c25.815,31.189) 25.794,30.43 ccw(c25.815,31.189) 26.352,30.652 ; C19.1@26.85,8.12 28.32,9.59 ; 29.08,10.96 cw(c29.08,10.244) 29.664,10.658 ccw(c29.08,10.244) 29.08,10.96 ; 48.04,64.058 cw(c48.402,64.058) 48.146,64.314 ccw(c48.402,64.058) 48.04,64.058 ; 48.04,64.058 ccw(c47.678,64.058) 47.934,64.314 cw(c47.678,64.058) 48.04,64.058 ; v1@48.975,44.51 ccw(c49.164,44.837) 49.261,44.472 ; v1@48.975,44.51 ccw(c49.164,44.837) 49.261,44.472 ; v1@48.975,44.51 ccw(c49.164,44.837) 49.261,44.472 ; v1@49.03,44.305 cw(c49.33,44.132) 49.24,44.467 ; v1@49.03,44.305 cw(c49.33,44.132) 49.24,44.467 ; v1@49.03,44.305 cw(c49.33,44.132) 49.24,44.467 ; 49.262,44.38 cw(c49.262,44.742) 49.006,44.486 ccw(c49.262,44.742) 49.262,44.38 ; 49.262,44.38 ccw(c49.262,44.018) 49.006,44.274 cw(c49.262,44.018) 49.262,44.38 ; C15.1@50.036,44.136 cw(c49.183,43.283) 50.39,43.283 ; C15.1@50.036,44.136 ccw(c49.448,43.548) 49.448,44.38 cw(c49.448,43.548) C15.1@50.036,44.136 ; C15.1@50.036,44.136 cw(c49.183,43.283) 50.39,43.283 ; 50.39,43.283 cw(c51.597,43.283) 50.744,44.136 ccw(c51.597,43.283) 50.39,43.283 ; P7.8@56.36,40.49 ccw(c56.434,41.631) 57.243,40.823 cw(c56.434,41.631) P7.8@56.36,40.49 ; P7.8@56.36,40.49 56.91,40.49 58.18,41.76 ; P7.4@56.36,50.65 ccw(c56.404,51.868) 57.266,51.006 cw(c56.404,51.868) P7.4@56.36,50.65 ; P7.4@56.36,50.65 56.91,50.65 58.24,51.98 ; P7.2@56.36,55.73 cw(c56.506,54.52) 57.368,55.382 ccw(c56.506,54.52) P7.2@56.36,55.73 ; P7.2@56.36,55.73 57.02,55.73 58.24,54.51 ; 57.38,45.57 cw(c57.38,46.137) 56.884,45.861 ccw(c57.38,46.137) 57.38,45.57 ; 57.38,45.57 ccw(c57.38,45.003) 56.884,45.279 cw(c57.38,45.003) 57.38,45.57 ; 57.38,45.57 58.18,44.77 58.18,41.76 ; 58.18,41.76 cw(c56.548,43.392) 56.399,41.089 ccw(c56.548,43.392) 58.18,41.76 ; 58.24,51.98 cw(c56.473,53.747) 56.382,51.25 ccw(c56.473,53.747) 58.24,51.98 ; 58.24,51.98 58.24,54.51 ; 58.24,54.51 ccw(c56.695,52.965) 56.432,55.134 cw(c56.695,52.965) 58.24,54.51 ; VT2.2@27.823,20.403 cw(c26.597,19.177) 28.33,19.177 ccw(c26.597,19.177) VT2.2@27.823,20.403 ; VT2.2@28.035,20.615 cw(c27.322,19.902) 28.33,19.902 ccw(c27.322,19.902) VT2.2@28.035,20.615 ; 29.193,10.96 ccw(c29.193,11.687) 29.707,11.173 cw(c29.193,11.687) 29.193,10.96 ; v1@48.917,44.38 ccw(c48.917,45.963) 50.036,44.844 cw(c48.917,45.963) v1@48.917,44.38 ; 49.159,57.14 ccw(c49.159,58.381) 50.036,57.504 cw(c49.159,58.381) 49.159,57.14 ; 49.207,57.14 cw(c49.207,55.967) 50.036,56.796 ccw(c49.207,55.967) 49.207,57.14 ; 49.612,57.14 cw(c49.612,56.232) 50.254,56.874 ccw(c49.612,56.232) 49.612,57.14 ; 49.642,44.38 ccw(c49.642,45.238) 50.249,44.631 cw(c49.642,45.238) 49.642,44.38 ; 54.887,40.48 ccw(c54.887,41.963) 55.936,40.914 cw(c54.887,41.963) 54.887,40.48 ; 54.936,40.48 cw(c54.936,39.066) 55.936,40.066 ccw(c54.936,39.066) 54.936,40.48 ; P7.4@56.371,50.95 ccw(c56.439,52.807) 57.753,51.493 cw(c56.439,52.807) P7.4@56.371,50.95 ; P7.8@56.379,40.789 ccw(c56.491,42.512) 57.711,41.291 cw(c56.491,42.512) P7.8@56.379,40.789 ; P7.2@56.396,55.432 cw(c56.6,53.742) 57.804,54.946 ccw(c56.6,53.742) P7.2@56.396,55.432
  Top Layer w0.5: C12.1@18.1,70.01 18.05,69.96 v1(16.88,69.96) 16.88,70.07 16.36,70.59 P8.2@16.36,76.4 16.36,78.38 16.95,78.97 25.05,78.97 28.49,75.53 28.49,68.95 29.66,67.78 U1.32@43.997,67.78 U1.31@43.997,66.51 U1.30@43.997,65.24 47.31,65.24 R12.1@47.79,65.72 ; VT1.2@23.38,43.27 C16.1@25.28,43.27 25.28,42.14 ; 24.99,41.85 25.28,42.14 ; 25.57,41.85 25.28,42.14 ; U5.5@35.79,15.796 41.016,15.796 41.36,16.14 ; C20.1@38.52,17.58 38.6,17.66 44.22,17.66 C2.1@44.38,17.5 ; C20.1@38.903,17.297 cw(c39.779,16.421) 39.779,17.66 ; C20.1@38.903,17.863 ccw(c39.393,18.353) 39.393,17.66 ; pad.5@39.62,25.23 ccw(c40.513,25.23) 39.882,24.598 ; C6.1@39.677,27.277 cw(c38.994,26.594) 39.96,26.594 cw(c40.926,26.594) C6.1@40.243,27.277 ; pad.5@39.693,25.407 ccw(c39.049,26.051) 39.96,26.051 ; pad.5@39.712,25.036 cw(c39.287,24.514) 39.96,24.514 ; C6.1@39.96,27.56 39.96,24.52 41.22,23.26 ; pad.5@40.12,25.23 ccw(c42.22,25.23) 40.735,23.745 ; 40.324,17.66 cw(c40.324,16.524) C21.1@41.127,17.327 ; 40.565,17.66 ccw(c40.565,18.455) C21.1@41.127,17.893 ; C4.2@40.756,12.546 C4.2@40.756,12.58 ; C21.1@41.893,17.327 cw(c42.696,16.524) 42.696,17.66 ; C21.1@41.893,17.893 ccw(c42.455,18.455) 42.455,17.66 ; C5.2@42.554,22.611 ccw(c41.22,21.564) 41.22,23.26 ; C5.2@42.554,23.909 cw(c41.22,24.956) 41.22,23.26 ; 43.269,17.66 cw(c43.269,16.489) C2.1@44.097,17.317 ; 43.559,17.66 ccw(c43.559,18.421) C2.1@44.097,17.883 ; C5.2@43.78,23.26 41.22,23.26 ; R12.1@47.47,65.63 R12.1@47.48,65.62 ; R12.1@47.99,65.76 R12.1@48.04,65.71 ; R12.1@48.171,65.579 R12.1@48.34,65.41 ; 16.36,75.193 cw(c17.567,75.193) 16.714,76.046 ccw(c17.567,75.193) 16.36,75.193 ; 16.36,75.193 ccw(c15.153,75.193) 16.006,76.046 cw(c15.153,75.193) 16.36,75.193 ; 16.36,77.607 cw(c15.153,77.607) 16.006,76.754 ccw(c15.153,77.607) 16.36,77.607 ; 16.36,77.607 ccw(c17.567,77.607) 16.714,76.754 cw(c17.567,77.607) 16.36,77.607 ; VT1.2@23.557,43.093 cw(c23.984,42.666) 23.984,43.27 ; VT1.2@23.557,43.093 cw(c23.984,42.666) 23.984,43.27 ; VT1.2@23.557,43.093 cw(c23.984,42.666) 23.984,43.27 ; VT1.2@23.557,43.093 cw(c23.984,42.666) 23.984,43.27 ; VT1.2@23.557,43.447 ccw(c23.984,43.873) 23.984,43.27 ; VT1.2@23.557,43.447 ccw(c23.984,43.873) 23.984,43.27 ; VT1.2@23.557,43.447 ccw(c23.984,43.873) 23.984,43.27 ; VT1.2@23.557,43.447 ccw(c23.984,43.873) 23.984,43.27 ; 24.214,43.27 cw(c24.214,42.304) C16.1@24.897,42.987 ; 24.214,43.27 ccw(c24.214,44.236) C16.1@24.897,43.553 ; 24.214,43.27 cw(c24.214,42.304) C16.1@24.897,42.987 ; 24.214,43.27 ccw(c24.214,44.236) C16.1@24.897,43.553 ; 24.214,43.27 cw(c24.214,42.304) C16.1@24.897,42.987 ; 24.214,43.27 ccw(c24.214,44.236) C16.1@24.897,43.553 ; 24.214,43.27 cw(c24.214,42.304) C16.1@24.897,42.987 ; 24.214,43.27 ccw(c24.214,44.236) C16.1@24.897,43.553 ; C16.1@24.997,42.987 cw(c24.314,42.304) 25.28,42.304 ; C16.1@24.997,42.987 cw(c24.314,42.304) 25.28,42.304 ; C16.1@24.997,42.987 cw(c24.314,42.304) 25.28,42.304 ; C16.1@24.997,42.987 cw(c24.314,42.304) 25.28,42.304 ; 25.28,42.304 cw(c26.246,42.304) C16.1@25.563,42.987 ; 25.28,42.304 cw(c26.246,42.304) C16.1@25.563,42.987 ; 25.28,42.304 cw(c26.246,42.304) C16.1@25.563,42.987 ; 25.28,42.304 cw(c26.246,42.304) C16.1@25.563,42.987 ; 45.657,65.24 ccw(c45.657,67.603) R12.1@47.328,65.932 ; 45.657,65.24 ccw(c45.657,67.603) R12.1@47.328,65.932 ; 45.657,65.24 ccw(c45.657,67.603) R12.1@47.328,65.932 ; 45.657,65.24 ccw(c45.657,67.603) R12.1@47.328,65.932 ; 46.413,65.404 cw(c46.956,64.465) R12.1@47.413,65.448 ; 46.413,65.404 cw(c46.956,64.465) R12.1@47.413,65.448 ; 46.413,65.404 cw(c46.956,64.465) R12.1@47.413,65.448 ; 46.413,65.404 cw(c46.956,64.465) R12.1@47.413,65.448 ; 46.413,65.404 cw(c46.956,64.465) R12.1@47.413,65.448 ; 46.864,65.24 ccw(c46.864,66.396) R12.1@47.681,65.579 ; 46.864,65.24 ccw(c46.864,66.396) R12.1@47.681,65.579 ; 46.864,65.24 ccw(c46.864,66.396) R12.1@47.681,65.579 ; 46.864,65.24 ccw(c46.864,66.396) R12.1@47.681,65.579 ; 16.717,70.233 cw(c16.444,69.96) 16.83,69.96 ccw(c16.444,69.96) 16.717,70.233 ; v1@17.014,69.96 ccw(c17.014,71.096) 17.817,70.293 cw(c17.014,71.096) v1@17.014,69.96 ; 17.255,69.96 cw(c17.255,69.165) 17.817,69.727 ccw(c17.255,69.165) 17.255,69.96
  Top Layer w0.8: 50.51,23.78 50.946,23.344 ; U2.6@50.946,21.95 50.946,23.344 ; 51.383,23.78 50.946,23.344 ; 50.946,23.344 ccw(c50.34,23.95) pad.2@51.16,24.2 cw(c50.34,23.95) 50.946,23.344 ; 51.642,24.039 cw(c52.03,23.651) pad.3@52.03,24.2 ; 51.642,24.039 cw(c52.03,23.651) pad.3@52.03,24.2 ; 51.642,24.039 cw(c52.03,23.651) pad.3@52.03,24.2 ; 51.642,24.039 cw(c52.03,23.651) pad.3@52.03,24.2 ; 51.642,24.039 cw(c52.03,23.651) pad.3@52.03,24.2 ; 51.642,24.039 cw(c52.03,23.651) pad.3@52.03,24.2 ; 51.642,24.039 cw(c52.03,23.651) pad.3@52.03,24.2 ; 51.642,24.039 cw(c52.03,23.651) pad.3@52.03,24.2
  Top Layer w1: pad.0@12.04,22.83 15.11,22.83 C17.1@19.96,22.83 C18.1@23.3,22.83 ; pad.0@12.414,22.376 cw(c13.509,21.281) 13.509,22.83 ; 39.44,3.46 ccw(c41,3.46) P1.2@39.897,2.357 ; P1.2@39.72,2.18 39.44,2.46 39.44,11.23 C4.2@40.756,12.546 ; C4.2@40.544,12.792 ccw(c38.211,15.125) 41.51,15.125 ; C4.2@40.756,12.58 41.51,13.334 C21.1@41.51,17.61
  Bottom Layer w0.3: v1@23.264,22.866 ccw(c22.887,23.243) 23.42,23.243 ; v1@23.42,22.76 23.42,26.24 25.79,28.61 v1(25.79,30.28) ; v1@25.684,30.174 cw(c25.428,29.918) 25.79,29.918 cw(c26.152,29.918) v1@25.896,30.174 ; v1(26.49,33.78) 27.16,34.45 v1(27.16,40.84) ; v1(45.39,41.39) 45.39,44.07 45.7,44.38 v1(48.9,44.38) 49.56,44.38 50.49,45.31 v1@50.49,56.98 ; 50.421,56.585 cw(c50.622,56.701) v1@50.463,56.871 ; 55.739,46.207 cw(c55.629,44.957) P7.6@56.59,45.763 ; P7.4@56.36,50.65 55.31,50.65 ; P7.6@56.39,45.54 P7.6@56.36,45.57 ; 26.746,34.036 cw(c26.49,34.292) 26.49,33.93 ccw(c26.49,34.292) 26.746,34.036 ; 26.746,34.036 ccw(c27.002,33.78) 26.64,33.78 cw(c27.002,33.78) 26.746,34.036 ; 27.16,40.478 cw(c27.522,40.478) 27.266,40.734 ccw(c27.522,40.478) 27.16,40.478 ; 27.16,40.478 ccw(c26.798,40.478) 27.054,40.734 cw(c26.798,40.478) 27.16,40.478 ; 45.39,41.752 cw(c45.028,41.752) 45.284,41.496 ccw(c45.028,41.752) 45.39,41.752 ; 45.39,41.752 ccw(c45.752,41.752) 45.496,41.496 cw(c45.752,41.752) 45.39,41.752 ; 48.538,44.38 cw(c48.538,44.018) 48.794,44.274 ccw(c48.538,44.018) 48.538,44.38 ; 48.538,44.38 ccw(c48.538,44.742) 48.794,44.486 cw(c48.538,44.742) 48.538,44.38 ; 49.262,44.38 cw(c49.262,44.742) 49.006,44.486 ccw(c49.262,44.742) 49.262,44.38 ; 49.262,44.38 ccw(c49.262,44.018) 49.006,44.274 cw(c49.262,44.018) 49.262,44.38 ; 55.31,50.65 cw(c55.31,50.031) 55.843,50.345 ccw(c55.31,50.031) 55.31,50.65 ; 55.31,50.65 ccw(c55.31,51.269) 55.843,50.955 cw(c55.31,51.269) 55.31,50.65 ; 55.31,50.65 54.77,50.11 54.77,46.63 55.83,45.57 P7.6@56.36,45.57 ; P7.6@56.36,45.57 cw(c56.208,46.436) 55.586,45.814 ccw(c56.208,46.436) P7.6@56.36,45.57 ; v1@50.254,56.874 cw(c49.684,56.304) 50.49,56.304 ccw(c49.684,56.304) v1@50.254,56.874 ; v1@50.364,50.644 cw(c50.06,50.34) 50.49,50.34 ccw(c50.06,50.34) v1@50.364,50.644 ; v1@50.364,50.856 ccw(c50.06,51.16) 50.49,51.16 cw(c50.06,51.16) v1@50.364,50.856 ; 50.49,50.436 cw(c50.784,50.436) 50.576,50.644 ccw(c50.784,50.436) 50.49,50.436 ; 50.49,51.064 ccw(c50.784,51.064) 50.576,50.856 cw(c50.784,51.064) 50.49,51.064 ; 54.77,46.63 ccw(c55.964,47.824) 56.256,46.161 cw(c55.964,47.824) 54.77,46.63 ; 55.178,46.222 ccw(c56.086,47.13) 56.308,45.865 cw(c56.086,47.13) 55.178,46.222
  other v1: 23.37,22.76 26.49,33.07 50.47,50.75 50.36,56.98
KEY1: C13.2 P7.1 R3.1 U1.28 | length 39.9
  Top Layer w0.5: U1.28@43.997,62.7 v1(47.02,62.7) ; v1(51.63,62.7) 51.65,62.7 52.45,61.9 R3.1@52.45,59.21 52.45,57.09 C13.2@52.49,57.05 ; R3.1@52.238,58.748 cw(c51.726,58.236) 52.45,58.236 cw(c53.174,58.236) R3.1@52.662,58.748 ; R3.1@52.238,59.672 ccw(c51.726,60.184) 52.45,60.184 ccw(c53.174,60.184) R3.1@52.662,59.672 ; R3.1@52.309,58.819 ccw(c53.633,60.143) 53.633,58.27 ; 52.45,58.212 ccw(c53.552,58.212) C13.2@52.773,57.433 ; 52.66,57.97 52.96,58.27 ; R3.1@52.66,58.57 52.96,58.27 ; R3.1@52.662,59.172 ccw(c54.84,61.35) 54.84,58.27 ; R3.1@52.747,58.916 ccw(c53.495,58.805) 52.96,58.27 ; C13.2@52.837,57.349 cw(c53.501,57.729) 52.96,58.27 ; P7.1@56.36,58.27 52.96,58.27 ; C13.2@52.207,57.433 ccw(c51.621,58.019) 52.45,58.019 ; C13.2@52.207,57.433 ccw(c51.621,58.019) 52.45,58.019 ; C13.2@52.207,57.433 ccw(c51.621,58.019) 52.45,58.019 ; C13.2@52.207,57.433 ccw(c51.621,58.019) 52.45,58.019 ; C13.2@52.403,57.1 cw(c52.913,57.392) 52.498,57.808 ; C13.2@52.403,57.1 cw(c52.913,57.392) 52.498,57.808 ; C13.2@52.403,57.1 cw(c52.913,57.392) 52.498,57.808 ; C13.2@52.403,57.1 cw(c52.913,57.392) 52.498,57.808 ; 55.153,58.27 cw(c55.153,57.063) P7.1@56.006,57.916 ; 55.153,58.27 ccw(c55.153,59.477) P7.1@56.006,58.624 ; 55.153,58.27 cw(c55.153,57.063) P7.1@56.006,57.916 ; 55.153,58.27 ccw(c55.153,59.477) P7.1@56.006,58.624 ; 55.153,58.27 cw(c55.153,57.063) P7.1@56.006,57.916 ; 55.153,58.27 ccw(c55.153,59.477) P7.1@56.006,58.624 ; 55.153,58.27 cw(c55.153,57.063) P7.1@56.006,57.916 ; 55.153,58.27 ccw(c55.153,59.477) P7.1@56.006,58.624
  Bottom Layer w0.5: v1(47.02,62.7) v1(51.63,62.7)
KEY2: C14.2 P7.3 R4.1 U1.14 | length 78.6
  Top Layer w0.3: U1.14@29.908,50.643 29.908,47.612 30.42,47.1 45.55,47.1 47.85,49.4 52.02,49.4 52.45,49.83 ; C14.2@52.45,50.6 52.45,49.83 ; U1.14@29.767,49.352 cw(c29.425,49.01) 29.908,49.01 ; U1.14@29.767,49.352 cw(c29.425,49.01) 29.908,49.01 ; U1.14@29.767,49.352 cw(c29.425,49.01) 29.908,49.01 ; U1.14@29.767,49.352 cw(c29.425,49.01) 29.908,49.01 ; 29.908,49.01 cw(c30.391,49.01) U1.14@30.049,49.352 ; 29.908,49.01 cw(c30.391,49.01) U1.14@30.049,49.352 ; 29.908,49.01 cw(c30.391,49.01) U1.14@30.049,49.352 ; 29.908,49.01 cw(c30.391,49.01) U1.14@30.049,49.352 ; C14.2@52.208,50.287 cw(c51.896,49.829) 52.45,49.829 ; C14.2@52.208,50.287 cw(c51.896,49.829) 52.45,49.829 ; C14.2@52.208,50.287 cw(c51.896,49.829) 52.45,49.829 ; C14.2@52.208,50.287 cw(c51.896,49.829) 52.45,49.829 ; 52.45,49.829 cw(c52.922,49.829) C14.2@52.712,50.252 ; 52.45,49.829 cw(c52.922,49.829) C14.2@52.712,50.252 ; 52.45,49.829 cw(c52.922,49.829) C14.2@52.712,50.252 ; 52.45,49.829 cw(c52.922,49.829) C14.2@52.712,50.252
  Top Layer w0.5: R4.1@52.45,52.98 52.49,52.94 C14.2@52.49,50.8 ; R4.1@52.565,52.453 cw(c53.027,51.339) 53.63,52.383 ; 52.69,51.975 R4.1@52.93,52.215 ; R4.1@52.69,52.455 R4.1@52.93,52.215 ; C14.2@52.207,51.183 ccw(c51.524,51.866) 52.49,51.866 ; C14.2@52.207,51.183 ccw(c51.524,51.866) 52.49,51.866 ; C14.2@52.207,51.183 ccw(c51.524,51.866) 52.49,51.866 ; C14.2@52.207,51.183 ccw(c51.524,51.866) 52.49,51.866 ; R4.1@52.238,52.518 cw(c51.629,51.909) 52.49,51.909 ; R4.1@52.238,52.518 cw(c51.629,51.909) 52.49,51.909 ; R4.1@52.238,52.518 cw(c51.629,51.909) 52.49,51.909 ; R4.1@52.238,52.518 cw(c51.629,51.909) 52.49,51.909 ; R4.1@52.309,52.589 ccw(c53.21,53.49) 53.21,52.215 ; R4.1@52.309,52.589 ccw(c53.21,53.49) 53.21,52.215 ; R4.1@52.309,52.589 ccw(c53.21,53.49) 53.21,52.215 ; R4.1@52.309,52.589 ccw(c53.21,53.49) 53.21,52.215 ; 52.49,51.866 ccw(c53.456,51.866) C14.2@52.773,51.183 ; 52.49,51.866 ccw(c53.456,51.866) C14.2@52.773,51.183 ; 52.49,51.866 ccw(c53.456,51.866) C14.2@52.773,51.183 ; 52.49,51.866 ccw(c53.456,51.866) C14.2@52.773,51.183 ; 52.49,52.102 cw(c53.078,52.102) R4.1@52.662,52.518 ; 52.49,52.102 cw(c53.078,52.102) R4.1@52.662,52.518 ; 52.49,52.102 cw(c53.078,52.102) R4.1@52.662,52.518 ; 52.49,52.102 cw(c53.078,52.102) R4.1@52.662,52.518 ; R4.1@52.93,52.215 55.385,52.215 P7.3@56.36,53.19 ; 55.506,52.336 cw(c56.36,51.483) P7.3@56.36,52.69 ; 55.506,52.336 ccw(c54.653,53.19) P7.3@55.86,53.19 ; 55.506,52.336 cw(c56.36,51.483) P7.3@56.36,52.69 ; 55.506,52.336 ccw(c54.653,53.19) P7.3@55.86,53.19 ; 55.506,52.336 cw(c56.36,51.483) P7.3@56.36,52.69 ; 55.506,52.336 ccw(c54.653,53.19) P7.3@55.86,53.19 ; 55.506,52.336 cw(c56.36,51.483) P7.3@56.36,52.69 ; 55.506,52.336 ccw(c54.653,53.19) P7.3@55.86,53.19 ; 55.691,52.56 cw(c56.535,52.334) P7.3@56.36,53.19 ; 55.691,52.56 cw(c56.535,52.334) P7.3@56.36,53.19 ; 55.691,52.56 cw(c56.535,52.334) P7.3@56.36,53.19 ; 55.691,52.56 cw(c56.535,52.334) P7.3@56.36,53.19 ; 55.691,52.56 cw(c56.535,52.334) P7.3@56.36,53.19 ; 55.73,52.521 ccw(c55.504,53.365) P7.3@56.36,53.19 ; 55.73,52.521 ccw(c55.504,53.365) P7.3@56.36,53.19 ; 55.73,52.521 ccw(c55.504,53.365) P7.3@56.36,53.19 ; 55.73,52.521 ccw(c55.504,53.365) P7.3@56.36,53.19 ; 55.73,52.521 ccw(c55.504,53.365) P7.3@56.36,53.19 ; R4.1@52.662,52.942 ccw(c54.418,54.698) 54.418,52.215 cw(c54.418,54.698) R4.1@52.662,52.942
KEY3: C15.2 P7.5 R5.1 U1.10 | length 97.7
  Top Layer w0.3: 20.27,55.937 ccw(c19.999,57.047) U1.10@20.975,56.454 ; U1.10@22.296,56.35 20.7,56.35 ; R5.1@52.43,47.19 52.43,47.77 ; 20.07,55.72 cw(c21.109,54.681) 21.142,56.15 ccw(c21.109,54.681) 20.07,55.72 ; 20.07,55.72 20.7,56.35 ; 20.07,55.72 20.07,50.57 23.78,46.86 28.93,46.86 29.95,45.84 46.16,45.84 48.5,48.18 52.02,48.18 52.43,47.77 ; 20.7,56.35 cw(c20.7,55.953) U1.10@20.997,56.217 ; 20.7,56.35 ccw(c20.7,56.747) U1.10@20.997,56.483 ; 20.7,56.35 cw(c20.7,55.953) U1.10@20.997,56.217 ; 20.7,56.35 ccw(c20.7,56.747) U1.10@20.997,56.483 ; 20.7,56.35 cw(c20.7,55.953) U1.10@20.997,56.217 ; 20.7,56.35 ccw(c20.7,56.747) U1.10@20.997,56.483 ; 20.7,56.35 cw(c20.7,55.953) U1.10@20.997,56.217 ; 20.7,56.35 ccw(c20.7,56.747) U1.10@20.997,56.483 ; R5.1@52.221,47.368 ccw(c51.939,47.77) 52.43,47.77 ; R5.1@52.221,47.368 ccw(c51.939,47.77) 52.43,47.77 ; R5.1@52.221,47.368 ccw(c51.939,47.77) 52.43,47.77 ; R5.1@52.221,47.368 ccw(c51.939,47.77) 52.43,47.77 ; 52.43,47.77 ccw(c52.874,47.77) R5.1@52.651,47.386 ; 52.43,47.77 ccw(c52.874,47.77) R5.1@52.651,47.386 ; 52.43,47.77 ccw(c52.874,47.77) R5.1@52.651,47.386 ; 52.43,47.77 ccw(c52.874,47.77) R5.1@52.651,47.386 ; 20.477,56.127 cw(c20.791,55.813) 21.036,56.183 ccw(c20.791,55.813) 20.477,56.127 ; 20.567,56.217 cw(c21.131,55.653) 21.148,56.45 ccw(c21.131,55.653) 20.567,56.217 ; 20.737,56.387 cw(c20.998,56.126) 21.201,56.433 ccw(c20.998,56.126) 20.737,56.387
  Top Layer w0.5: 52.45,45.61 53.04,46.2 ; C15.2@52.52,44.35 52.45,44.42 R5.1@52.45,46.79 53.04,46.2 ; R5.1@52.632,46.301 cw(c53.032,45.776) 53.362,46.348 ; C15.2@52.207,44.973 ccw(c51.621,45.559) 52.45,45.559 ; C15.2@52.207,44.973 ccw(c51.621,45.559) 52.45,45.559 ; C15.2@52.207,44.973 ccw(c51.621,45.559) 52.45,45.559 ; C15.2@52.207,44.973 ccw(c51.621,45.559) 52.45,45.559 ; R5.1@52.238,46.328 cw(c51.726,45.816) 52.45,45.816 ; R5.1@52.238,46.328 cw(c51.726,45.816) 52.45,45.816 ; R5.1@52.238,46.328 cw(c51.726,45.816) 52.45,45.816 ; R5.1@52.238,46.328 cw(c51.726,45.816) 52.45,45.816 ; 52.45,45.752 ccw(c53.552,45.752) C15.2@52.773,44.973 ; 52.45,45.752 ccw(c53.552,45.752) C15.2@52.773,44.973 ; 52.45,45.752 ccw(c53.552,45.752) C15.2@52.773,44.973 ; 52.45,45.752 ccw(c53.552,45.752) C15.2@52.773,44.973 ; 52.45,45.816 cw(c53.174,45.816) R5.1@52.662,46.328 ; 52.45,45.816 cw(c53.174,45.816) R5.1@52.662,46.328 ; 52.45,45.816 cw(c53.174,45.816) R5.1@52.662,46.328 ; 52.45,45.816 cw(c53.174,45.816) R5.1@52.662,46.328 ; 53.04,46.2 ccw(c52.763,45.923) 52.586,46.272 cw(c52.763,45.923) 53.04,46.2 ; 53.04,46.2 54.45,46.2 P7.5@56.36,48.11 ; 55.506,47.256 cw(c56.36,46.403) P7.5@56.36,47.61 ; 55.506,47.256 ccw(c54.653,48.11) P7.5@55.86,48.11 ; 55.506,47.256 cw(c56.36,46.403) P7.5@56.36,47.61 ; 55.506,47.256 ccw(c54.653,48.11) P7.5@55.86,48.11 ; 55.506,47.256 cw(c56.36,46.403) P7.5@56.36,47.61 ; 55.506,47.256 ccw(c54.653,48.11) P7.5@55.86,48.11 ; 55.506,47.256 cw(c56.36,46.403) P7.5@56.36,47.61 ; 55.506,47.256 ccw(c54.653,48.11) P7.5@55.86,48.11 ; 55.691,47.48 cw(c56.535,47.254) P7.5@56.36,48.11 ; 55.691,47.48 cw(c56.535,47.254) P7.5@56.36,48.11 ; 55.691,47.48 cw(c56.535,47.254) P7.5@56.36,48.11 ; 55.691,47.48 cw(c56.535,47.254) P7.5@56.36,48.11 ; 55.691,47.48 cw(c56.535,47.254) P7.5@56.36,48.11 ; 55.73,47.441 ccw(c55.504,48.285) P7.5@56.36,48.11 ; 55.73,47.441 ccw(c55.504,48.285) P7.5@56.36,48.11 ; 55.73,47.441 ccw(c55.504,48.285) P7.5@56.36,48.11 ; 55.73,47.441 ccw(c55.504,48.285) P7.5@56.36,48.11 ; 55.73,47.441 ccw(c55.504,48.285) P7.5@56.36,48.11 ; R5.1@52.662,46.752 ccw(c53.995,48.085) 53.995,46.2 cw(c53.995,48.085) R5.1@52.662,46.752
KEY4: P7.7 U1.27 | length 34
  Top Layer w0.3: v1@46.89,61.43 v1(46.92,61.4)
  Top Layer w0.5: U1.27@43.997,61.43 v1@46.89,61.43
  Bottom Layer w0.3: v1(46.92,61.4) 52.34,61.4 53.56,60.18 53.56,44.56 55.09,43.03 ; P7.7@56.36,43.03 55.09,43.03 ; 47.282,61.4 cw(c47.282,61.762) 47.026,61.506 ccw(c47.282,61.762) 47.282,61.4 ; 47.282,61.4 ccw(c47.282,61.038) 47.026,61.294 cw(c47.282,61.038) 47.282,61.4 ; 55.09,43.03 cw(c55.09,41.986) 55.897,42.649 ccw(c55.09,41.986) 55.09,43.03 ; 55.09,43.03 ccw(c55.09,44.074) 55.897,43.411 cw(c55.09,44.074) 55.09,43.03
NetC3_1: C3.1 U2.1 | length 10.8
  Top Layer w0.5: U2.1@53.486,27.35 53.486,28.116 53.98,28.61 55.1,28.61 C3.1@55.22,28.49 ; 54.206,28.61 cw(c54.206,27.576) C3.1@54.937,28.307 ; 54.206,28.61 cw(c54.206,27.576) C3.1@54.937,28.307 ; 54.206,28.61 cw(c54.206,27.576) C3.1@54.937,28.307 ; 54.206,28.61 cw(c54.206,27.576) C3.1@54.937,28.307 ; 54.303,28.61 ccw(c54.303,29.507) C3.1@54.937,28.873 ; 54.303,28.61 ccw(c54.303,29.507) C3.1@54.937,28.873 ; 54.303,28.61 ccw(c54.303,29.507) C3.1@54.937,28.873 ; 54.303,28.61 ccw(c54.303,29.507) C3.1@54.937,28.873 ; U2.1@53.536,27.85 cw(c54.3,27.85) 53.76,28.39 ccw(c54.3,27.85) U2.1@53.536,27.85 ; U2.1@53.536,27.95 cw(c54.058,27.95) 53.689,28.319 ccw(c54.058,27.95) U2.1@53.536,27.95
NetC3_2: C3.2 D1.2 L1.1 U2.8 | length 35.1
  Top Layer w0.5: D1.2@56.144,22.312 58.332,22.312 58.73,22.71 58.73,27.08 C3.2@57.32,28.49 57.24,28.57 L1.1@57.24,36.46 ; L1.1@56.427,35.247 cw(c54.464,33.284) 57.24,33.284 cw(c60.016,33.284) L1.1@58.053,35.247 ; L1.1@56.78,35.601 cw(c55.671,34.491) 57.24,34.491 cw(c58.809,34.491) L1.1@57.7,35.601 ; D1.2@56.874,21.782 cw(c58.155,20.501) 58.155,22.312 cw(c58.155,24.123) D1.2@56.874,22.842 ; C3.2@57.037,28.873 ccw(c56.547,29.363) 57.24,29.363 ; 57.24,29.749 ccw(c58.479,29.749) C3.2@57.603,28.873 ; C3.2@57.32,27.99 cw(c57.32,26.783) 58.174,27.636 ; C3.2@57.72,28.39 ccw(c58.444,28.39) C3.2@57.932,27.878
  Top Layer w0.8: U2.8@53.416,22.479 ccw(c53.819,22.883) 53.819,22.312 ; U2.8@53.63,22.312 D1.2@56.144,22.312 ; D1.2@55.52,21.888 ccw(c54.495,20.863) 54.495,22.312 ccw(c54.495,23.761) D1.2@55.52,22.736
NetC5_1: C5.1 C6.2 C10.1 C11.2 L1.2 L2.2 R1.2 SW.1 U3.5 | length 142.4
  Top Layer w0.3: v1@24.445,29.245 26.765,29.245 27.352,29.832 U3.5@27.352,31.906 27.352,32.362 27.94,32.95 39.36,32.95 39.96,33.55 ; v1@24.506,29.396 ccw(c24.871,29.761) 24.871,29.245 ; L2.2@37.95,36.45 L2.2@39.34,37.84 ; L2.2@37.994,36.827 cw(c39.659,35.967) 39.659,37.84 ; L2.2@38.261,36.689 cw(c40.151,35.712) 40.151,37.84 ; L2.2@38.527,36.551 cw(c40.644,35.457) C10.1@40.644,37.84 ; L2.2@38.794,36.414 cw(c41.137,35.202) C10.1@41.137,37.84 ; L2.2@39.06,36.276 cw(c41.63,34.947) C10.1@41.63,37.84 ; 40.164,37.711 cw(c40.339,37.057) C10.1@40.826,37.527 ; C10.1@40.436,38.07 cw(c39.595,38.342) 39.824,37.488 cw(c40.051,36.642) C10.1@40.643,37.287 ; C10.1@40.5,38.215 cw(c39.319,38.897) 39.672,37.58 cw(c39.92,36.653) C10.1@40.61,37.319 ; C10.1@40.62,37.31 ccw(c39.34,36.031) L2.2@39.34,37.84 ; C10.1@40.62,38.37 cw(c39.34,39.649) L2.2@39.34,37.84 ; C10.1@40.832,37.522 ccw(c40.064,36.755) 40.064,37.84 ccw(c40.064,38.925) C10.1@40.832,38.158 ; C10.1@41.63,37.84 L2.2@39.34,37.84 ; C10.1@41.85,37.84 44.56,37.84 C11.2@45.04,38.32 ; C10.1@42.574,37.84 ccw(c42.574,40.686) C11.2@44.586,38.674 ; C10.1@42.868,37.522 cw(c43.636,36.754) 43.636,37.84 cw(c43.636,38.926) C10.1@42.868,38.158 ; C10.1@42.903,38.119 ccw(c43.389,38.502) 43.542,37.902 ; C10.1@43.022,38.423 ccw(c43.705,39.269) 43.987,38.218 ccw(c44.273,37.151) C10.1@43.246,37.561 ; C10.1@43.08,37.31 cw(c44.361,36.029) 44.361,37.84 cw(c44.361,39.651) C10.1@43.08,38.37 ; C10.1@43.139,38.304 ccw(c43.785,38.814) 43.989,38.017 ; C10.1@43.195,37.458 cw(c44.208,36.857) 43.916,37.998 ; C10.1@43.298,37.84 ccw(c43.298,39.962) C11.2@44.799,38.461 ; 44.023,37.84 ccw(c44.023,39.237) C11.2@45.011,38.249 ; L1.2@48.01,36.46 L1.2@49.24,36.46
  Top Layer w0.8: C6.2@40,29.66 cw(c40,25.78) C5.1@42.744,28.524 ; C10.1@40.65,37.839 cw(c38.294,37.836) 39.96,36.17 ; C10.1@41.63,37.84 39.96,36.17 ; 41.931,29.66 cw(c41.931,27.711) C5.1@43.309,29.089 ; C5.1@44.256,29.095 cw(c45.931,27.673) 45.931,29.87 ; C5.1@44.866,28.577 cw(c47.66,26.204) R1.2@47.66,29.87 ; C11.2@45.03,38.56 cw(c45.03,37.449) 45.815,38.235 ; C11.2@45.04,38.32 46.15,38.32 ; C11.2@45.14,38.07 cw(c45.14,35.028) 47.291,37.179 ; 46.995,37.475 ccw(c48.4,38.88) L1.2@49.163,37.045 ; R1.2@47.66,29.87 44.49,29.87 44.28,29.66 C6.2@39.96,29.66 39.96,33.55 39.96,36.17 ; L1.2@47.841,36.629 ccw(c48.897,37.685) L1.2@49.47,36.306 ; L1.2@48.01,36.46 46.15,38.32 ; L1.2@48.856,37.784 cw(c47.904,40.074) 46.15,38.32
  Bottom Layer w0.5: SW.1@14.07,43.83 ccw(c14.07,45.93) 15.555,44.445 ; SW.1@14.07,44.33 ccw(c14.07,47.637) 16.409,45.299 ; SW.1@14.512,43.596 cw(c15,43.338) 15,43.89 18.11,47 26.17,47 26.17,35.23 23.98,33.04 23.98,29.95 ; 24.145,29.785 cw(c23.65,29.29) v1@24.35,29.29
  other v1: 24.4,29.29